# Altium PCB MainBoard.PcbDoc
Units mil, origin at the board's own origin, x right, y up, seen from the top; angles counter-clockwise.
Board outline 1122.36 x 925 mil, 2 copper layers (Top1, Bottom4), stack 42.17 mil thick; 34 components, 54 nets, 214 pads, 143 vias.
Unrouted connection lines stored in the file: 28.
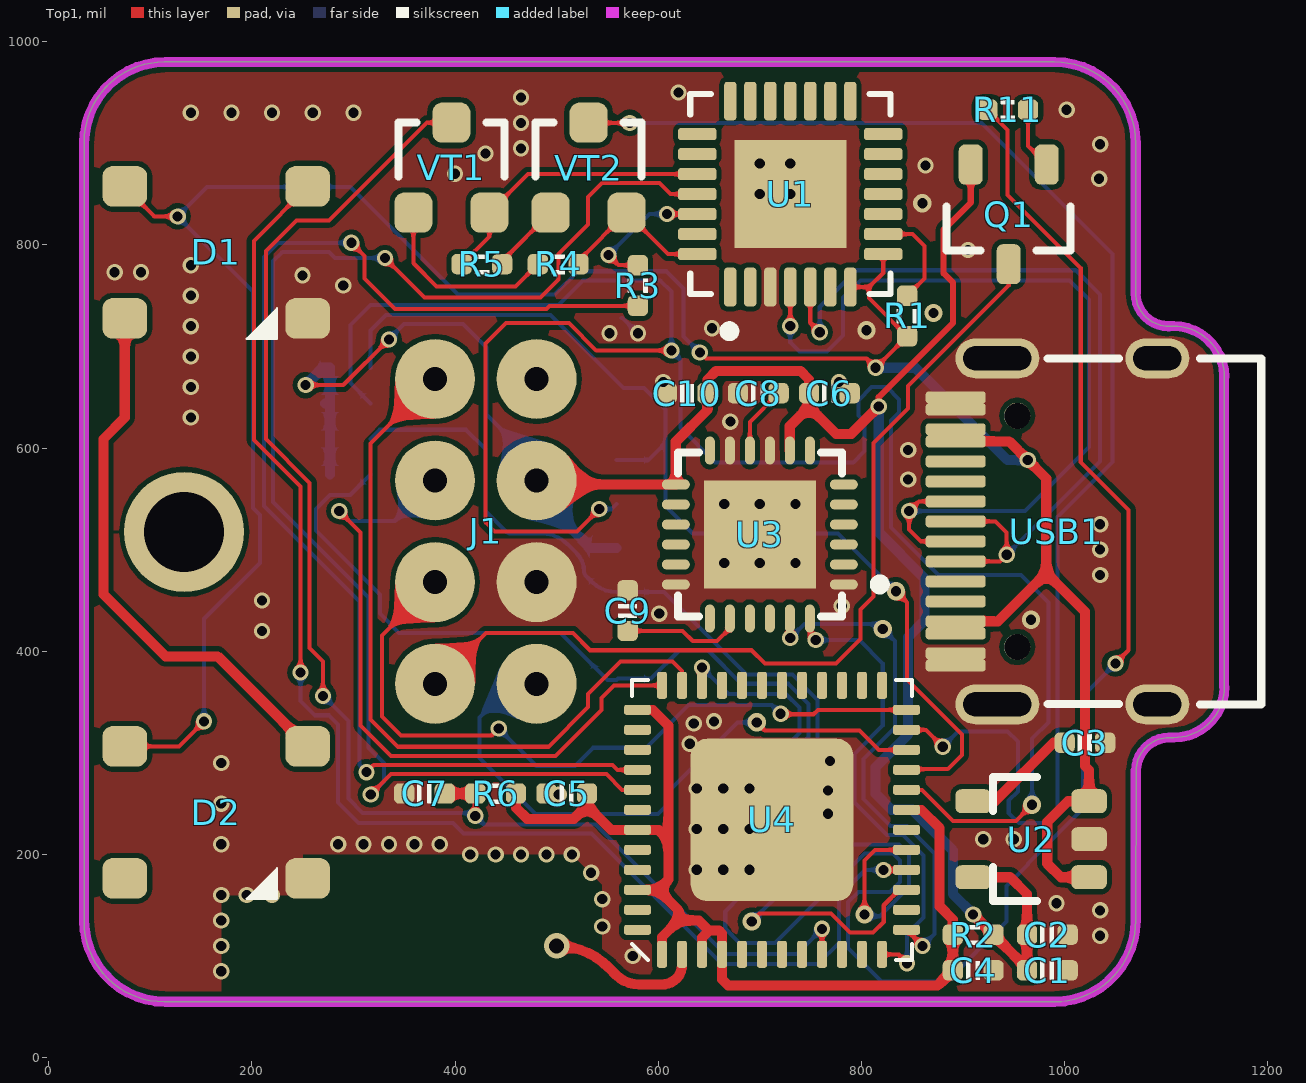
[diagram p0: Top1 view]
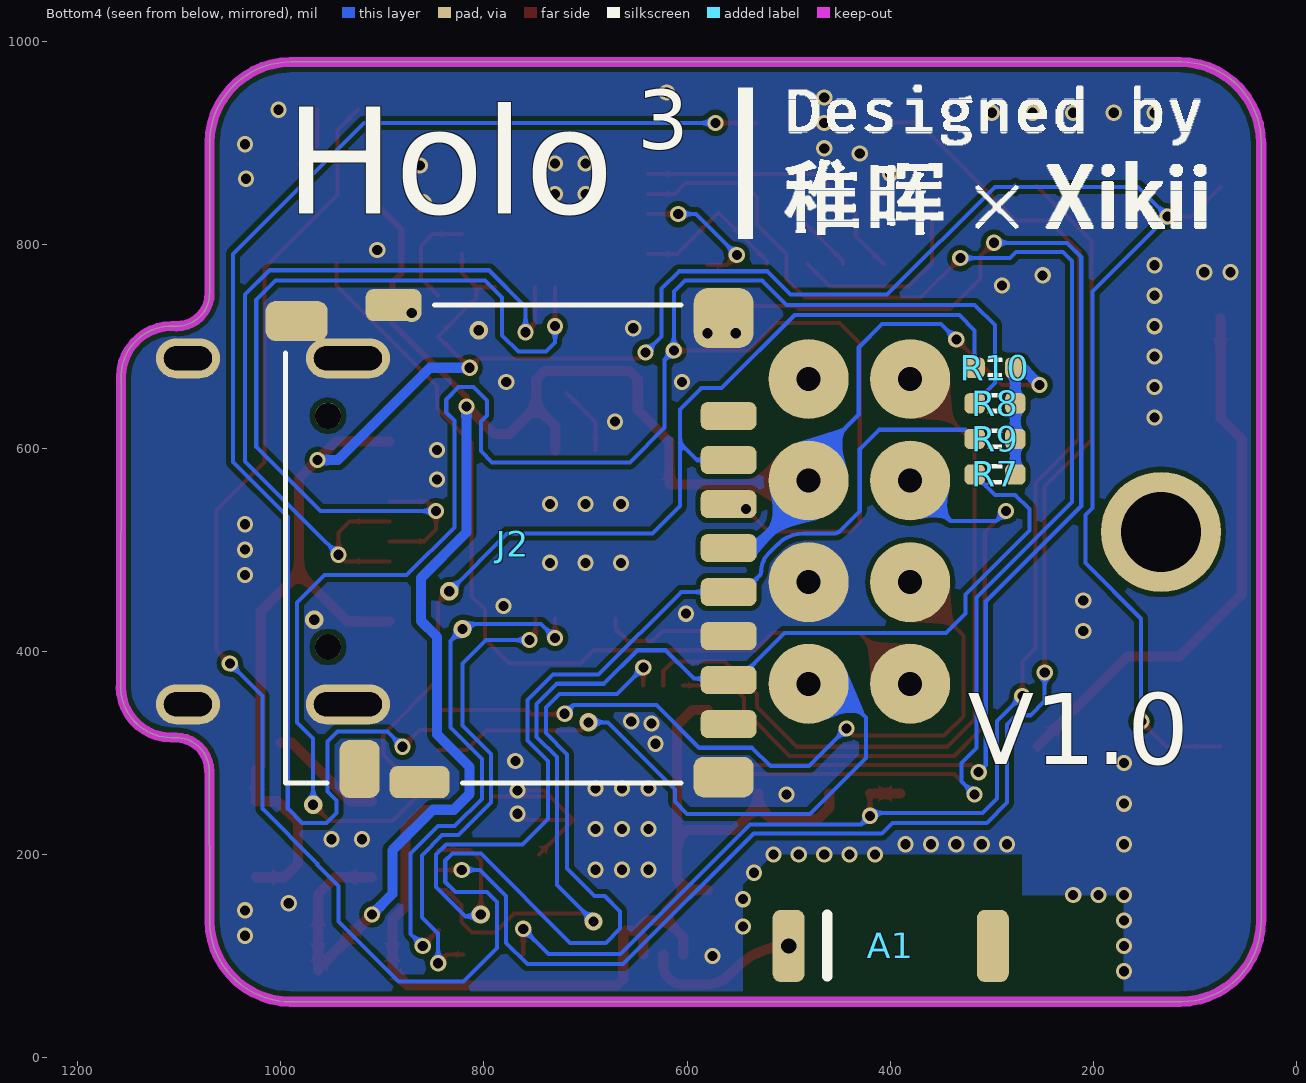
[diagram p1: Bottom4 view, seen from below]
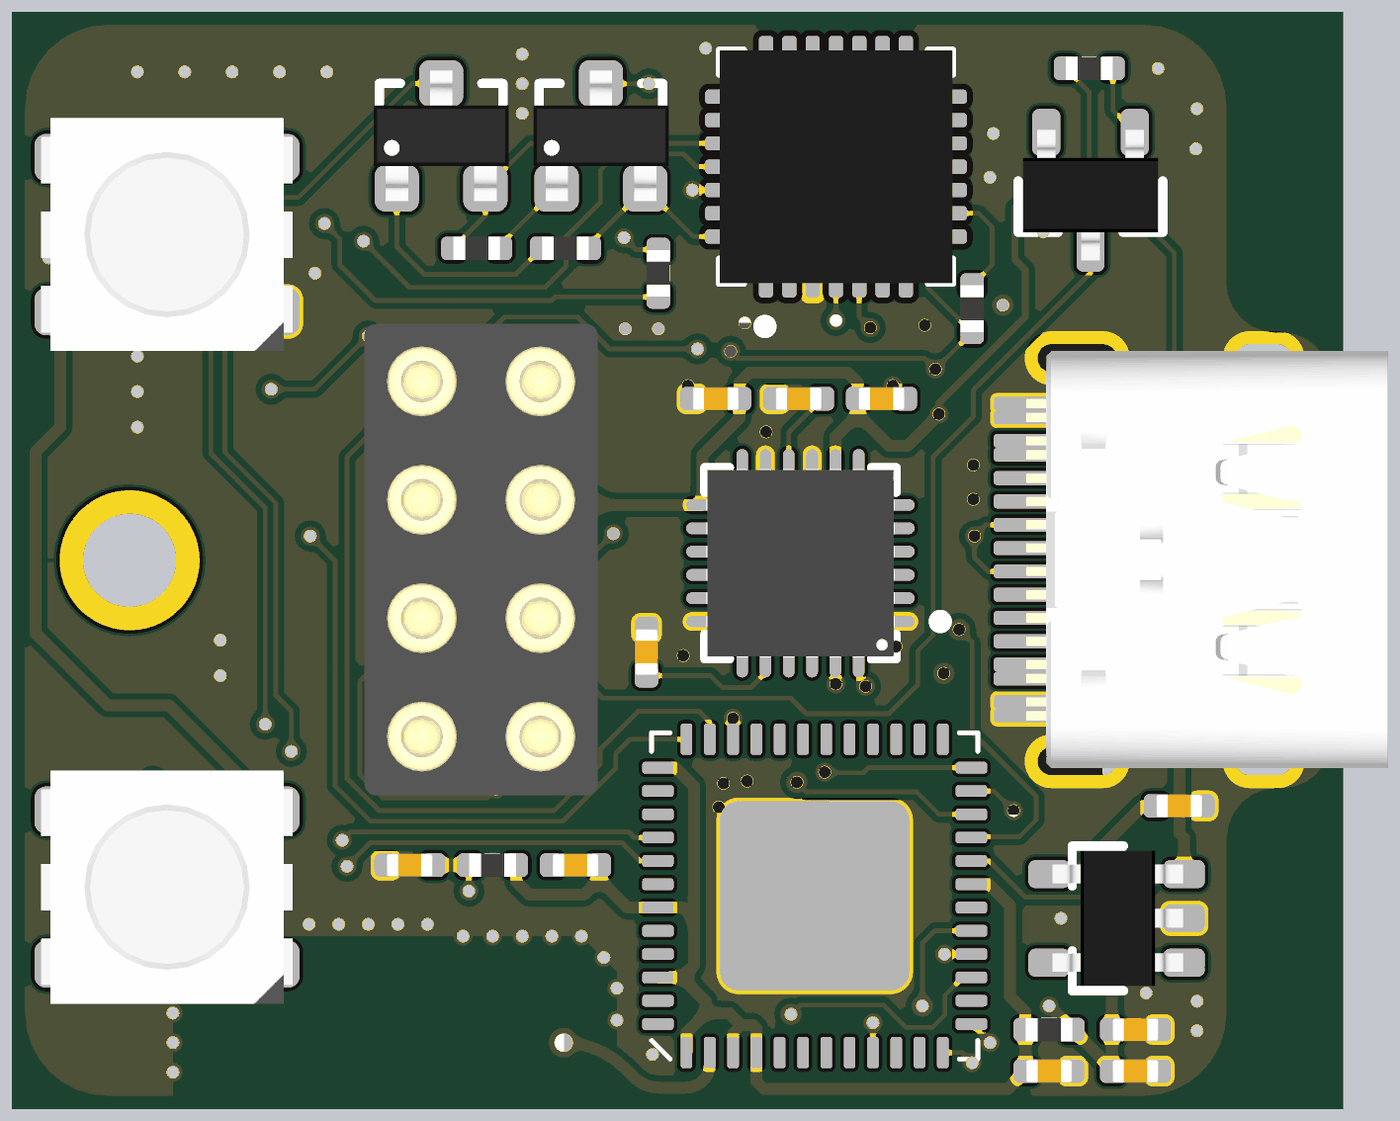
[diagram p2: 3D render of the assembled board from above, using the file's embedded part models]
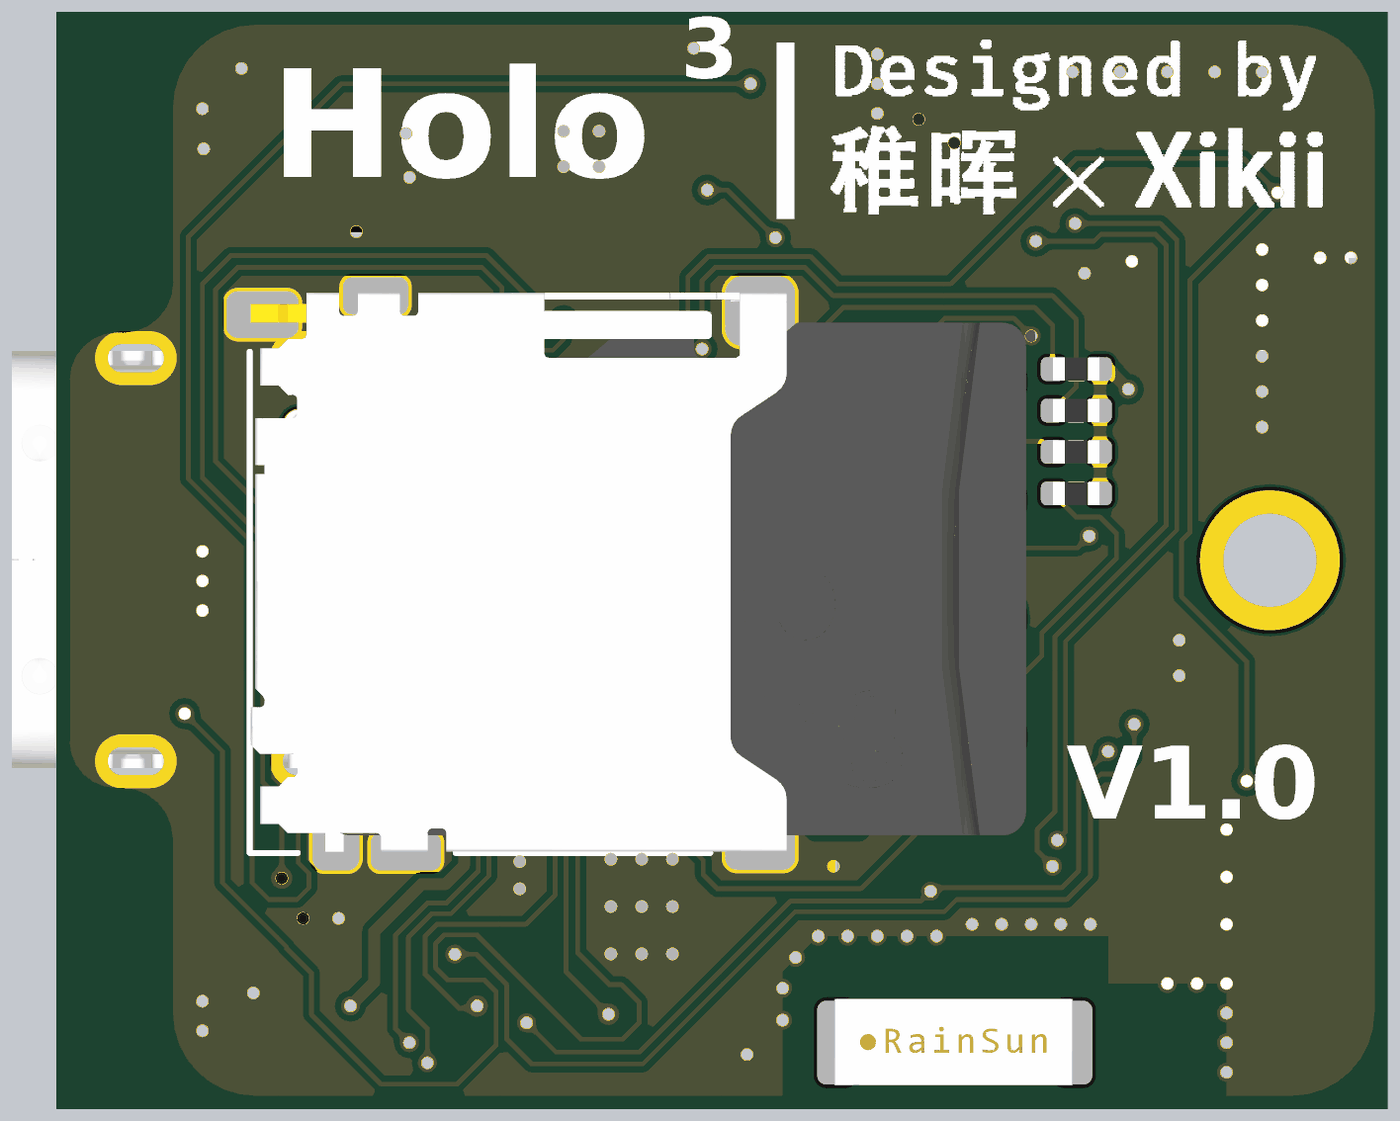
[diagram p3: 3D render of the assembled board from below, using the file's embedded part models]

## Layer stack, top to bottom
Top Solder: solder mask 0.4, Solder Resist, Dk 3.5
Top1: signal copper 1.4
Dielectric 2: core 39.37, PP-006, Dk 4.2
Bottom4: signal copper 1.4
Bottom Solder: solder mask 0.4, Solder Resist, Dk 3.5

## Board outline
34.99,133.74 34.99,901.26 cw(c113.73,901.26) 113.73,980 989.99,980 cw(c990.01,900.02) 1069.99,900 1069.99,752.48 ccw(c1102.39,752.32) 1102.47,719.92 1107.04,719.92 1107.04,720.13 cw(c1107.04,669.97) 1157.21,669.97 1157,669.97 1157.35,364.91 cw(c1107.44,364.91) 1107.44,315 1102.98,315 ccw(c1102.98,282.4) 1070.39,282.4 1069.99,135 cw(c990.01,134.98) 989.99,55 113.73,55 cw(c113.73,133.74)

## Design rules (kind name [scope] priority, off if disabled: settings)
Clearance [All] p1: gap=5 ignorepadtopadclearanceinfootprint=FALSE
ComponentClearance [All] p1: gap=0 collisioncheckmode=3 verticalgap=0 showdistances=FALSE
DiffPairsRouting [All] p1: maxlimit=9 minlimit=9 mostfreqgap=9 toplayer_minwidth=4 toplayer_maxwidth=4 toplayer_prefwidth=4 bottomlayer_minwidth=4 bottomlayer_maxwidth=4 bottomlayer_prefwidth=4 maxuncoupledlength=500
FanoutControl Fanout_BGA [All] p1: bgadir=Out bgaviamode=Centered fanoutstyle=Auto fanoutdirection=Alternating viagrid=1 // Fanout_BGA (Default Rule)
HoleSize [All] p1: absolutevalues=TRUE maxlimit=10000 minlimit=8 maxpercent=80.000 minpercent=20.000
MinimumSolderMaskSliver [All] p1 off: minsoldermaskwidth=2
PlaneClearance [All] p1: clearance=8
PlaneConnect [All] p1: planeconnectstyle=Direct reliefexpansion=20 reliefentries=4 reliefconductorwidth=10 reliefairgap=10
PolygonConnect [All] p1: connectstyle=Direct reliefconductorwidth=10 reliefentries=4 polygonreliefangle="90 Angle" airgapwidth=10
RoutingVias [All] p1: holewidth=8 width=16 viastyle="Through Hole" minholewidth=6 minwidth=12 maxholewidth=28 maxwidth=50
SilkToBoardRegionClearance [All] p1 off:
SilkToSilkClearance [All] p1: silktosilkclearance=0
SilkToSolderMaskClearance [IsPad] p1: minsilkscreentomaskgap=0 clearancetoexposedcopper=TRUE
SolderMaskExpansion [All] p1: expansion=3 istentingtop=FALSE
Width [All] p1: maxlimit=10000 minlimit=4 preferedwidth=4
20 further rules are at their usual default settings.

## Classes and differential pairs
net class GND: GND

## Components (designator, comment, footprint, x,y, rotation, side; value= is the part's Value field where it differs from the comment)
A1 "RAINSUN" ANT-Rainsun-AN5120 400,110 r180 bottom
C1 "0.1uF" CAP_0402 983,86 r180 top value=0.1u
C2 "10uF" CAP_0402 983,121 r180 top value=0.1u
C3 "10nF" CAP_0402 1020,310 r180 top value=0.1u
C4 "10uF" CAP_0402 910,86 r180 top value=0.1u
C5 "0.1uF" CAP_0402 510,260 r0 top value=0.1u
C6 "10nF" CAP_0402 768.5,654 r0 top value=0.1u
C7 "1uF" CAP_0402 370,260 r180 top value=0.1u
C8 "0.1uF" CAP_0402 698.5,654 r180 top value=0.1u
C9 "2.2nF" CAP_0402 570,440 r270 top value=0.1u
C10 "0.1uF" CAP_0402 628.5,654 r0 top value=0.1u
D1 "RGB" LED_5050_WS2812B 165,792.59 r0 top
D2 "RGB" LED_5050_WS2812B 165,241.41 r0 top
J1 "SPING-CONNECTOR-8P" SPRING-CONNECTOR-8P 430.32,518 r90 top
J2 "TF-Socket" "TF-Card-Amphenol with TF" 559.06,501.61 r90 bottom locked
Q1 "AO3415A" SOT23-3 945,830 r270 top
R1 "10K" RES_0402 845,730 r90 top value=22R
R2 "0R" RES_0402 910,121 r180 top value=22R
R3 "200R" RES_0402 580,760 r90 top value=22R
R4 "12K" RES_0402 501.5,781 r180 top value=22R
R5 "12K" RES_0402 426.5,781 r0 top value=22R
R6 "10K" RES_0402 440,260 r180 top value=22R
R7 "10K" RES_0402 296.89,574 r0 bottom value=22R
R8 "10K" RES_0402 296.89,644 r0 bottom value=22R
R9 "10K" RES_0402 296.89,609 r0 bottom value=22R
R10 "10K" RES_0402 296.89,679 r0 bottom value=22R
R11 "1K" RES_0402 944,933 r0 top value=22R
U1 "CP2102" QFN-28 730,850 r90 top value=Value
U2 "LP2992 3V3" SOT23-5 965,215 r180 top
U3 "MPU6050" QFN-24 700,515 r180 top locked
U4 "ESP32_SIP" QFN-48_7X7 712,234 r90 top
USB1 "Type-C" Type-C-TOP 992,518 r0 top
VT1 "S8050" SMT_TRIODE_NPN 396.5,876 r0 top
VT2 "S8050" SMT_TRIODE_NPN 531.5,876 r0 top

## Footprints (in the part's own frame and the unit in brackets; to place one, negate y for a bottom-side part, rotate by r counter-clockwise, add the part's x,y. Pads: shape width x height; smd on the part's side, far side on the other; paste and mask are expansions set on the pad)
ANT-Rainsun-AN5120 [mm] "选择焊盘"
  rrect50% 0.8x1.8 smd: 1(-2.54,0) ""(2.563,0)
  silkscreen extent -1.57,-0.76 -1.57,0.79, body extent -2.57,-0.91 2.54,0.94, height 1.32
CAP_0402 [mil]
  rrect50% 20x20 smd: 1(-20,0) 2(20,0)
  silkscreen extent -7,-9 7,9, body extent -20,-10 20,10, height 20
LED_5050_WS2812B [mil]
  rrect50% 44x40 smd: 1(-90,65) 2(-90,-65) 3(90,-65) 4(90,65)
  silkscreen extent 30,-85 60,-55, body extent -106,-98 106,98, height 69
QFN-24 [mm] "QFN, 24-Leads, Body 4.1x4.1mm (max), Pitch 0.50mm, IPC Low Density"
  oval 0.7x0.25 smd: 1(-2.1,1.25) 2(-2.1,0.75) 3(-2.1,0.25) 4(-2.1,-0.25) 5(-2.1,-0.75) 6(-2.1,-1.25) 13(2.1,-1.25) 14(2.1,-0.75) 15(2.1,-0.25) 16(2.1,0.25) 17(2.1,0.75) 18(2.1,1.25)
  oval 0.25x0.7 smd: 7(-1.25,-2.1) 8(-0.75,-2.1) 9(-0.25,-2.1) 10(0.25,-2.1) 11(0.75,-2.1) 12(1.25,-2.1) 19(1.25,2.1) 20(0.75,2.1) 21(0.25,2.1) 22(-0.25,2.1) 23(-0.75,2.1) 24(-1.25,2.1)
  rect 2.8x2.7 smd: ""(0,0)
  silkscreen extent -3.13,-2.05 2.05,2.05, body extent -2.02,-2.02 2.02,2.02, height 0.95
QFN-28 [mil]
  rrect50% 38x12 smd mask+5: 1(-91.5,59.06) 2(-91.5,39.37) 3(-91.5,19.68) 4(-91.5,0) 5(-91.5,-19.69) 6(-91.5,-39.37) 7(-91.5,-59.06) 15(91.5,-59.06) 16(91.5,-39.37) 17(91.5,-19.69) 18(91.5,0) 19(91.5,19.68) 20(91.5,39.37) 21(91.5,59.06)
  rrect50% 12x38 smd mask+5: 8(-59.06,-91.5) 9(-39.37,-91.5) 10(-19.68,-91.5) 11(0,-91.5) 12(19.69,-91.5) 13(39.37,-91.5) 14(59.06,-91.5) 22(59.06,91.5) 23(39.37,91.5) 24(19.69,91.5) 25(0,91.5) 26(-19.68,91.5) 27(-39.37,91.5) 28(-59.06,91.5)
  rect 106.3x110.24 smd: 29(0,0)
  silkscreen extent -140,-98 98,98, body extent -98,-98 98,98, height 35
QFN-48_7X7 [mm]
  rrect20% 4.064x4.064 smd: 0(0,0)
  rrect50% 0.675x0.25 smd: 1(-3.363,2.75) 2(-3.363,2.25) 3(-3.363,1.75) 4(-3.363,1.25) 5(-3.363,0.75) 6(-3.363,0.25) 7(-3.363,-0.25) 8(-3.363,-0.75) 9(-3.363,-1.25) 10(-3.363,-1.75) 11(-3.363,-2.25) 12(-3.363,-2.75) 25(3.363,-2.75) 26(3.363,-2.25) 27(3.363,-1.75) 28(3.363,-1.25) 29(3.363,-0.75) 30(3.363,-0.25) 31(3.363,0.25) 32(3.363,0.75) 33(3.363,1.25) 34(3.363,1.75) 35(3.363,2.25) 36(3.363,2.75)
  rrect50% 0.25x0.675 smd: 13(-2.75,-3.363) 14(-2.25,-3.363) 15(-1.75,-3.363) 16(-1.25,-3.363) 17(-0.75,-3.363) 18(-0.25,-3.363) 19(0.25,-3.363) 20(0.75,-3.363) 21(1.25,-3.363) 22(1.75,-3.363) 23(2.25,-3.363) 24(2.75,-3.363) 37(2.75,3.363) 38(2.25,3.363) 39(1.75,3.363) 40(1.25,3.363) 41(0.75,3.363) 42(0.25,3.363) 43(-0.25,3.363) 44(-0.75,3.363) 45(-1.25,3.363) 46(-1.75,3.363) 47(-2.25,3.363) 48(-2.75,3.363)
  silkscreen extent -3.5,-3.5 3.5,3.5, body extent -3.5,-3.5 3.5,3.5, height 1
RES_0402 [mil]
  rrect50% 20x20 smd: 1(-20,0) 2(20,0)
  silkscreen extent -7,-10 7,10, body extent -20,-10 20,10, height 14
SMT_TRIODE_NPN [mm] "Surface mount NPN transistor, package SOT-23"
  rrect50% 0.95x1 smd: 1(-0.95,-1.125) 2(0.95,-1.125) 3(0,1.125)
  silkscreen extent -1.33,-0.22 1.32,1.13, body extent -1.45,-1.4 1.45,1.4, height 1.3
SOT23-3 [mm] "SOT23, 3-Leads, Body 3.1x3.0mm (max), Pitch 0.95mm, IPC Medium Density"
  rrect50% 1x0.6 smd: 1(-1.246,0.95) 2(-1.246,-0.95) 3(1.246,0)
  silkscreen extent -0.2,-1.55 0.9,1.55, body extent -1.3,-1.45 1.5,1.45, height 1.2
SOT23-5 [mm] "SOT23, 3-Leads, Body 3.1x3.0mm (max), Pitch 0.95mm, IPC Medium Density"
  rrect50% 0.889x0.6 smd: 1(-1.5,0.95) 2(-1.5,0) 3(-1.5,-0.95) 4(1.396,-0.95) 5(1.396,0.95)
  silkscreen extent -0.2,-1.55 0.9,1.55, body extent -1.48,-1.45 1.32,1.45, height 1.2
SPRING-CONNECTOR-8P [mm]
  round 2 hole 0.6: 1(-3.81,1.27) 2(-3.81,-1.27) 3(-1.27,1.27) 4(-1.27,-1.27) 5(1.27,1.27) 6(1.27,-1.27) 7(3.81,1.27) 8(3.81,-1.27)
  body extent -5.06,-2.5 5.06,2.5, height 6
"TF-Card-Amphenol with TF" [mm]
  rrect50% 0.7x1.397 smd: 1(3.3,0) 2(2.2,0) 3(1.1,0) 4(0,0) 5(-1.1,0) 6(-2.2,0) 7(-3.3,0) 8(-4.4,0)
  rrect50% 1x1.55 smd: 9(5.675,10.8)
  rrect50% 1.45x1 smd: 10(-5.525,9.225)
  rrect50% 1.5x1.5 smd: S1(5.75,0.125)
  rrect50% 1.016x1.5 smd: S2(-5.727,0.125)
  rrect50% 0.8x1.4 smd: S3(6.075,8.375)
  rrect50% 0.8x1.5 smd: S4(-5.85,7.725)
  silkscreen extent -5.87,1.19 6.07,11.07, body extent -5.85,-5.58 6.15,11.06, height 1.69
Type-C-TOP [mm]
  round 0.65 hole 0.65: 0(-0.98,-2.89) 0(-0.98,2.89)
  oval 1.6x1 hole 0.6 slot 1.2 at 0 deg: 1(2.52,4.325) 2(2.52,-4.325)
  oval 2.1x1 hole 0.6 slot 1.7 at 0 deg: 3(-1.48,-4.325) 4(-1.48,4.325)
  rrect50% 1.5x0.3 smd: A1(-2.52,-3.35) A4(-2.52,-2.55) A5(-2.52,-1.25) A6(-2.52,-0.25) A7(-2.52,0.25) A8(-2.52,1.25) A9(-2.52,2.55) A12(-2.52,3.35) B1(-2.52,3.05) B4(-2.52,2.25) B5(-2.52,1.75) B6(-2.52,0.75) B7(-2.52,-0.75) B8(-2.52,-1.75) B9(-2.52,-2.25) B12(-2.52,-3.05)
  silkscreen extent -0.22,-4.33 5.12,4.33, body extent -2.57,-4.48 5.18,4.48, height 3.26

## Part data
A1: library part ANT-Rainsun-AP5120
C1 C2 C3 C4 C5 C6 C7 C8 C9 C10: library part 电容-0402, "Capacitor"
D1 D2: library part LED_5050_WS2812B, "LED", Type=5050
J2: "10 _8 + 2_ Position Card Connector Secure Digital - microSDâ„¢ Surface Mount, Right Angle Gold", Package=None, Availability=Unavailable, MF="Amphenol Commercial Products", MP=1140084168, Price=None, SnapEDA_Link=https://www.snapeda.com/parts/1140084168/Amphenol/view-part/4544529/?ref=snap
Q1: "MOSFET", LatestRevisionDate=17-Jul-2002, LatestRevisionNote="Re-released for DXP Platform.", PackageDescription="TO, Flat Index; 3 In-Line, Axial Leads; Body Dia. 4.6mm; Lead Dia. 0.5 mm (max)", PackageReference=E3, PackageVersion=1995/1996, Published=8-Jun-2000, Publisher="Altium Limited"
R1 R2 R3 R4 R5 R6 R7 R8 R9 R10 R11: library part 电阻-0402, "Resistor"
U1: "USB转TTL", MFG #1="SILICON LABS", PART DESC="SINGLE-CHIP USB TO UART BRIDGE, QFN28, RoHS.", PART NUMBER=CP2102, RefDes=RefDes, Type=DEV
U2: library part LP2992, "LDO"
U3: "六轴传感器"
U4: library part ESP32-PICO
USB1: library part USB-Type-C-TOP
VT1 VT2: library part SMT_TRIODE_NPN, "Surface mount NPN transistor, package SOT-23"

## Free pads (board coordinates)
  round 118.11 hole 78.74: ""(133.42,517.5)

## Via types
v1: diameter 16, hole 10, Top1 to Bottom4, tented both sides, 132 vias
v2: diameter 18, hole 10, Top1 to Bottom4, tented both sides, 10 vias
v3: diameter 25, hole 15, Top1 to Bottom4, tented both sides, 1 vias

## Nets (pads, with @x,y where several pads share a name; then routed paths per layer and width w, separated by ;. In a path a pad name is that pad's centre, name@x,y a point inside that pad or via, vN(x,y) a via of type N, cw(c..) or ccw(c..) an arc to the next point about the centre after c; other vN are vias at no path point)
3V3: C1.2 C2.2 C6.1 C10.2 J1.6 J2.4 Q1.2 R2.1 R7.1 R8.1 R9.1 R10.1 U2.5 U3.8 U3.13 | length 2226.5
  Top1 w4: v1(253,662) 290,662 v1(334.95,706.95)
  Top1 w6: v1(817,641) 817,650 890,723 890,763 881,772 881,815 907.6,841.6 Q1.2
  Top1 w10: J1.6@484.1,564.21 U3.13 617.32,606.32 648.5,637.5 C10.2 648.5,667.5 657,676 740,676 748.5,667.5 C6.1 748.5,640.5 ; U3.8 729.53,621.53 748.5,640.5 ; v1(817,641) 790,614 775,614 748.5,640.5 ; v1(910,141) R2.1 C1.2@963,88 ; U2.5 946.4,177.6 963,161 C2.2 C1.2@963,88 ; C1.2 C1.2@963,88
  Bottom4 w4: v1(334.95,706.95) 350,722 408,722 431,699 431,633 480.32,583.68 J1.6
  Bottom4 w10: v1(253,662) 270,679 R10.1 R8.1 ; R8.1@272,644 R8.1 ; R7.1 R9.1 R8.1 ; J1.6 480.32,554.68 533.39,501.61 J2.4 ; v1(817,641) 817,517 862,472 862,430 846,414 846,318 814,286 814,259.7 829.7,244 850,244 890,204 890,161 v1(910,141)
3V3A: C4.2 C5.2 R2.2 R6.1 U4.1 U4.3 U4.4 U4.19 U4.37 U4.43 U4.46 | length 1041.9
  Top1 w10: R6.1 460,246 471,235 517,235 530,248 ; C5.2 530,248 ; U4.46 599.9,165.1 ; U4.37 594.73,342.27 610,327 610,215 ; U4.1 603.73,118.73 620,135 ; U4.3 643.1,118.1 650,125 ; U4.19 859.16,243.84 877,226 877,149 890,136 R2.2 C4.2 875,71 669,71 662.79,77.21 U4.4 662.79,122.21 660,125 650,125 ; 530,248 553.84,224.16 U4.43 600.84,224.16 610,215 ; 599.9,165.1 610,175.2 610,215 ; 599.9,165.1 620,145 620,135 ; 620,135 640,135 650,125
BH_SCL: U3.23 U4.13 | length 513.8
  Top1 w4: U3.23 729.9,431.95 v1(729.9,413.1) ; U4.13 v1(860.11,110)
  Bottom4 w4: v1(729.9,413.1) 743.79,427 816,427 v2(821,422) 833,410 833,325 802,294 802,254.73 828.73,228 845,228 872,201 872,121.89 v1(860.11,110)
BH_SDA: U3.24 U4.12 | length 480.1
  Top1 w4: U3.24 749.21,413.79 752,411 v1(755,411) ; U4.12 836.38,101.62 v1(845,93)
  Bottom4 w4: v1(755,411) 798,411 821,388 821,327 793,299 793,251 825,219 841,219 861,199 861,138 845,122 v1(845,93)
CP_Rx: U1.25 U4.41 | length 1374.3
  Top1 w4: v1(317,259) 337,279 549,279 564.47,263.53 U4.41 ; v1(331,787) 370,748 484,748 502,766 502,791 531,820 531,847 544.69,860.69 601.32,860.69 612,850 U1.25
  Bottom4 w4: v1(317,259) 330,272 330,290 315,305 315,453 221,547 221,784 230,793 276,793 282,787 v1(331,787)
CP_Tx: R3.1 U4.40 | length 1235.2
  Top1 w4: v1(298,802) 311,789 311,767 341,737 490,737 493,740 R3.1 ; v1(313,281) 320,288 555,288 559.79,283.21 U4.40
  Bottom4 w4: v1(298,802) 226,802 212,788 212,543 306,449 306,288 v1(313,281)
DC: J1.2 U4.22 | length 608.7
  Top1 w4: v2(697,330) 705,322 798,322 817.1,302.9 U4.22
  Bottom4 w4: J1.2 457,368 424,335 424,295 479,240 600,240 612,252 612,264 678,330 v2(697,330)
DTR: R4.1 U1.28 VT2.2 | length 156.8
  Top1 w4: R4.1 521.5,784.31 VT2.2 609.67,790.94 U1.28
EN: C7.1 R6.2 U4.9 VT1.3 | length 1427.6
  Top1 w4: v1(270,356) 270,390 257,403 257,565.73 214,608.73 214,794 244,824 276,824 372.29,920.29 VT1.3 ; C7.1@388,262 C7.1 ; v1(420,238) R6.2 ; U4.9 v1(761.21,126.79)
  Top1 w10: C7.1 R6.2
  Bottom4 w4: v1@270,356.41 295,331.41 295,255 309,241 417,241 v1(420,238) 428.36,229.64 538.09,229.64 665.73,102 736.43,102 v1(761.21,126.79)
FLASH_CLK: U4.31
FLASH_CS: U4.25
FLASH_SD0: U4.27
FLASH_SD1: U4.33
FLASH_SD2: U4.30
FLASH_SD3: U4.32
GND: C1.1 C2.1 C3.1 C4.1 C5.1 C6.2 C7.2 C8.2 C9.1 C10.1 D1.3 D2.3 J1.4 J2.6 J2.9 J2.10 J2.S1 J2.S2 J2.S3 J2.S4 U1.3 U1.29 U2.2 U3. U3.1 U3.9 U3.11 U3.18 U4.0 USB1.1 USB1.2 USB1.3 USB1.4 USB1.A1 USB1.A12 USB1.B1 USB1.B12 | length 263.8
  Top1 w4: U4.0@745.9,200.1 U4.0 ; v1(767,240) 763,240 757,234 U4.0 ; v1(767,263) 741,263 U4.0@725,247 ; U4.0@790,257 735,257 U4.0@725,247 ; U4.0 U4.0@725,247
  Bottom4 w4: J2.S1 565.01,727.99 v1(580,713)
  other v1: 170,85 575,100 170,110 1035,120 545,129 170,135 1035,145 992,152 545,156 170,160 195,160 220,160 534,182 638,185 664,185 690,185 415,200 440,200 465,200 490,200 515,200 170,210 285,210 310,210 335,210 360,210 385,210 920,215 950,215 638,225 664,225 690,225 170,250 502,259 638,265 664,265 690,265 170,290 769,292 631,309 635,329 655,331 210,420 601,437 780.71,444.63 210,450 1035,475 665,487 700,487 735,487 1035,500 1035,525 665,545 700,545 735,545 846,569 846,598 671,626 140,630 140,660 605,665 778,665 140,690 552,713 653,718 140,720 140,750 290,760 250,770 65,773 91,773 140,780 905,795 700,850 730,850 1034,865 400,870 863,878 700,880 730,880 430,890 465,895 1035,899 465,920 140,930 180,930 220,930 260,930 300,930 1002,933 465,945 620,950
  other v2: 967,431 805,716 871,733 860,841
GPIO0: U4.23 VT2.3 | length 1395.9
  Top1 w4: VT2.3 531.79,920 v1(572,920) ; U4.23 863.42,322.58 v1(880,306)
  Bottom4 w4: v1(572,920) 918,920 1047,791 1047,586.27 993,532.27 993,245 979,231 955,231 945,241 945,253 954,262 954,311 944,321 895,321 v1(880,306)
GPIO4: J1.3 U4.24 | length 726.5
  Top1 w4: J1.3 328,415.68 328,336 347,317 436,317 v1(443,324) ; v1(720.5,338.5) 721,338 753,338 757.27,342.27 U4.24
  Bottom4 w4: v1(443,324) 480,287 518,287 536,305 588,305 630,347 712,347 v1(720.5,338.5)
GPIO5: R11.1 U4.34 | length 1826.5
  Top1 w4: v1(643,384) 643.1,383.9 U4.34 ; R11.1 944,913 944,849 1015.87,777.13 1015.87,586.13 1063,539 1063,401 v1(1050,388)
  Bottom4 w4: v1(643,384) 669,358 725.54,358 739,344.54 739,319.46 718,298.46 718,186 691,159 681,159 666,144 666,127 680,113 715,113 803,201 831,201 838,194 838,173 828,163 797,163 787,153 787,108 820,75 884,75 943,134 943,169 964,190 964,191 1018,245 1018,356 v1(1050,388)
GPIO9: U4.28
GPIO10: U4.29
GPIO12: U4.18
GPIO13: J2.3 R8.2 U4.20 | length 2050.1
  Top1 w4: v1(542,540) 520,518 439,518 430,527 430,703 450,723 512,723 539,696 v1(613,696) ; U4.20 859.47,263.53 890,233 952,233 v2(968,249)
  Bottom4 w4: R8.2 297,663.89 297,721 317,741 502,741 526,765 602,765 613,754 v1(613,696) 622,687 622,620 656,586 792,586 803,597 803,626 797,632 797,647 810,660 825,660 837,648 837,635 829,627 829,521.97 875.97,475 957,475 984,448 984,330 968,314 v2(968,249) ; v1(542,540) 554.13,540 J2.3
GPIO14: J2.5 R9.2 U4.17 | length 1030
  Top1 w4: v2(803,141) 803,194 813.47,204.47 U4.17
  Bottom4 w4: R9.2 325.89,618 411,618 430,599 430,538 450,518 ; 450.01,517.99 ccw(c454.83,522.83) 454.83,516 485,516 cw(c485,479.79) 510.61,505.39 519.93,496.07 cw(c502.86,479) 527,479 ccw(c534.24,479) 529.12,473.88 534.54,468.46 ccw(c559.06,492.98) J2.5 605.69,458.31 687,377 732,377 757,352 757,312 737,292 737,235 762,210 837,210 847,200 847,168 818,139 805,139 v2(803,141)
GPIO15: J2.2 R10.2 U4.21 | length 1032.1
  Top1 w4: v2(834,459) 845,448 845,372 899,318 899,298 885,284 845.17,284 U4.21
  Bottom4 w4: R10.2 316.89,715.89 332,731 494,731 566,659 586,659 607,638 607,605 ; J2.2 590.23,588.23 607,605 ; v2(834,459) 777,516 634,516 607,543 607,605
GPIO18: J1.7 U4.35 | length 739.3
  Top1 w4: J1.7 317,604.68 317,333 344,306 492,306 531,345 531,358 563,390 614,390 623.42,380.58 U4.35
GPIO19: U4.38
GPIO21: U4.42
GPIO22: U4.39
GPIO23: J1.5 U4.36 | length 679.7
  Top1 w4: v1(286,538) 307,517 307,327 337,297 499,297 544,342 544,354 556.38,366.38 U4.36
  Bottom4 w4: v1(286,538) 296,528 340.32,528 J1.5
GPIO25: U4.14
GPIO26: J2.7 R7.2 U4.15 | length 1108.1
  Top1 w4: v2(692,134) 699.79,141.79 770.21,141.79 789,123 811.63,123 822,133.37 822,150 837.1,165.1 U4.15
  Bottom4 w4: R7.2 296.89,554 277,554 263,540 263,519 326,456 326,437 345,418 504,418 550.31,371.69 J2.7 560.36,373 593,373 621,401 649,401 682,368 728.27,368 748,348.27 748,315.73 728,295.73 728,170 v2(692,134)
GPIO27: D1.4 U4.16 | length 1362.6
  Top1 w4: v1(248,379) 248,562 202,608 202,804 D1.4@256,858 ; v1(821.79,184.79) U4.16
  Bottom4 w4: v1(248,379) 248,351 262,337 276,337 285,328 285,251 305,231 398,231 408.36,220.64 534.36,220.64 663,92 757,92 778,113 778,159 803.79,184.79 v1(821.79,184.79)
GPIO34: U4.10
GPIO35: U4.11
GPIO37: U4.6
GPIO38: U4.7
LCD_BL_VCC: J1.1 Q1.3 | length 891.2
  Top1 w4: J1.1 430.32,418 516,418 533,401 692,401 705,388 775,388 799,412 799,441 812,454 812,605 846,639 846,661 945,760 Q1.3
NetA1_1: A1.1 U4.2 | length 155.9
  Top1 w10: v3(500,110) cw(c500,37.57) 551.21,88.79 558.81,81.19 ccw(c581,103.38) 581,72 603.51,72 ccw(c603.51,92.49) 618,78 ccw(c604.92,91.08) 623.42,91.08 U4.2
NetC3_2: C3.2 U2.4 | length 113.8
  Top1 w10: U2.4 931.4,252.4 989,310 C3.2
NetC8_1: C8.1 U3.10 | length 68.1
  Top1 w4: U3.10 690.16,625.66 C8.1
NetC9_2: C9.2 U3.20 | length 119.6
  Top1 w4: C9.2 624,420 634,410 658,410 670.47,422.47 U3.20
NetD1_2: D1.2 D2.4 | length 543.7
  Top1 w10: D1.2@75,728 75,630 54,609 54,456 115,395 166.41,395 D2.4
NetQ1_1: Q1.1 R11.2 | length 61.6
  Top1 w4: R11.2 964,897.46 Q1.1
NetR1_2: R1.2 U1.9 | length 101.4
  Top1 w4: U1.9 850.37,810.63 862,799 862,767 R1.2
NetR3_2: R3.2 U1.26 | length 137.3
  Top1 w4: v1(551,790) 561,780 R3.2 ; v1(608.69,830.32) U1.26
  Bottom4 w4: v1(551,790) 591.32,830.32 v1(608.69,830.32)
NetR4_2: R4.2 VT1.1 | length 190.8
  Top1 w4: VT1.1 359.1,781.9 382,759 459.5,759 R4.2
NetR5_2: R5.2 VT2.1 | length 70.4
  Top1 w4: R5.2 446.5,784.11 VT2.1
RTS: R5.1 U1.24 VT1.2 | length 282.4
  Top1 w4: R5.1 433.9,808.4 VT1.2 471.88,869.69 U1.24
SENSOR_VN: U4.8
SENSOR_VP: U4.5
USB-PWR-DM: U1.5 USB1.A7 USB1.B7 | length 797.9
  Top1 w4: U1.5 749.69,723.32 v1(759,714) ; USB1.B7 936.47,488.47 v1(943,495) 943,517 932.16,527.84 USB1.A7
  Bottom4 w4: v1(759,714) 759,739 795,775 1011,775 1035,751 1035,587 965,517 v1(943,495)
USB-PWR-DP: U1.4 USB1.A6 USB1.B6 | length 877.3
  Top1 w4: v1(730,720) U1.4 ; USB1.A6 858.84,508.16 846.99,520.01 v1(846.99,537.99) 856.53,547.53 USB1.B6
  Bottom4 w4: v1(730,720) 730,704 739,695 766,695 782,711 782,748 799,765 1005,765 1024,746 1024,601 960.99,537.99 v1(846.99,537.99)
VDD_5V: D1.1 D2.1 R1.1 U1.7 U1.8 U2.1 U2.3 USB1.A4 USB1.A9 USB1.B4 USB1.B9 | length 2562.1
  Top1 w4: D2.1 128.41,306.41 v1(153,331) ; D1.1@75,857 104,828 v1(127,828) ; v1(641,694) 647,688 805,688 v1(814,679) R1.1 807.5,747.5 807.5,758.5 ; U1.7 807.5,758.5 ; U1.8 821.5,772.5 807.5,758.5
  Top1 w10: USB1.B9 934.42,429.42 982,477 ; USB1.B4 945.42,606.58 v1(963.71,588.29) 982,570 982,477 ; U2.1 996.4,177.6 983,191 983,232 1003.4,252.4 U2.3 1024.06,282.94 1020,287 1020,439 982,477
  Bottom4 w4: v1(153,331) 153,432 208,487 208,534 201,541 201,754 v1(127,828) 156,857 255,857 297,857 403,751 498,751 521,774 608,774 625,757 625,710 v1(641,694)
  Bottom4 w10: v1(814,679) 853,679 943.71,588.29 v1(963.71,588.29)
pads on no net: A1. D2.2 J1.8 J2.1 J2.8 U1.1 U1.2 U1.6 U1.10 U1.11 U1.12 U1.13 U1.14 U1.15 U1.16 U1.17 U1.18 U1.19 U1.20 U1.21 U1.22 U1.23 U1.27 U3.2 U3.3 U3.4 U3.5 U3.6 U3.7 U3.12 U3.14 U3.15 U3.16 U3.17 U3.19 U3.21 U3.22 U4.26 U4.44 U4.45 U4.47 U4.48 USB1.0 USB1.A5 USB1.A8 USB1.B5 USB1.B8

## Polygon pours and split planes (outlines as drawn)
GND on Top1 "GND_L01_P000" (solid, remove dead copper, pour order 0): 35,980 1155,980 1155,55 35,55
GND on Bottom4 "GND_L02_P001" (solid, remove dead copper, pour order 1): 35,980 1155,980 1155,55 35,55

## Keep-outs
Keep-Out Layer:
  lines w10: 34.82,135 34.82,900 ; 35,135 ccw(c115,135) 115,55 990,55 ccw(c990,135) 1070,135 1070,282.4 ; 35,900 cw(c115,900) 115,980 990,980 cw(c990,900) 1070,900 1070,752.5 ; 1069.9,752.5 ccw(c1102.5,752.5) 1102.5,719.9 ; 1070.4,282.4 cw(c1103,282.4) 1103,315 1107.44,315 ccw(c1107.44,364.91) 1157.35,364.91 ; 1102.5,720 1107.04,720 ; 1107.04,720.13 cw(c1107.04,669.97) 1157.21,669.97 ; 1157,364.91 1157,669.97

## Other copper
Top1:
  pour cut-out: 250,200 515,200 545,170 545,35 170,35 170,160 250,160
Bottom4:
  pour cut-out: 270,200 515,200 545,170 545,35 170,35 170,160 270,160

## Silkscreen, mask and mechanical layers (free items; w line width, h text height)
Bottom Overlay:
  drawing of 1487 lines, arcs and shapes, not listed
  text "3" at 649,875 h100
  text "Holo" at 996,796 h180
  text "V1.0" at 323.5,265.5 h120
Mechanical 1:
  lines w10: 1107.04,719.92 1102.47,719.92 cw(c1102.39,752.32) 1069.99,752.48 1069.99,900 ccw(c990.01,900.02) 989.99,980 371.29,980 344.99,980 113.73,980 ccw(c113.73,901.26) 34.99,901.26 34.99,649.8 34.99,380 34.99,133.74 ccw(c113.73,133.74) 113.73,55 989.99,55 ccw(c990.01,134.98) 1069.99,135 1070.39,282.4 cw(c1102.98,282.4) 1102.98,315 1107.44,315 ccw(c1107.44,364.91) 1157.35,364.91 1157,669.97 ; 1107.04,720.13 cw(c1107.04,669.97) 1157.21,669.97
Drill Drawing:
  circle w10: c110.62,2265.28 r33.33
  lines w10: 77.29,1631.94 110.62,1648.61 143.96,1631.94 127.29,1665.28 143.96,1698.61 110.62,1681.94 77.29,1698.61 93.96,1665.28 77.29,1631.94 ; 77.29,1815.28 110.62,1781.94 143.96,1815.28 110.62,1848.61 77.29,1815.28 ; 77.29,1998.61 143.96,1998.61 110.62,1931.94 77.29,1998.61 ; 77.29,2081.94 143.96,2081.94 143.96,2148.61 77.29,2148.61 77.29,2081.94 ; 77.29,2398.61 93.96,2398.61 110.62,2381.94 127.29,2398.61 143.96,2398.61 127.29,2415.28 143.96,2431.94 127.29,2431.94 110.62,2448.61 93.96,2431.94 77.29,2431.94 93.96,2415.28 77.29,2398.61 ; 77.29,2548.61 93.96,2548.61 93.96,2531.94 127.29,2531.94 127.29,2548.61 143.96,2548.61 143.96,2581.94 127.29,2581.94 127.29,2598.61 93.96,2598.61 93.96,2581.94 77.29,2581.94 77.29,2548.61
  lines w15: 17.5,1586.94 13225.79,1586.94 ; 17.5,2636.94 13225.79,2636.94 ; 568.38,1436.94 568.38,2786.94 ; 1158.22,1436.94 1158.22,2786.94 ; 2257.9,1436.94 2257.9,2786.94 ; 2763.78,1436.94 2763.78,2786.94 ; 3497.58,1436.94 3497.58,2786.94 ; 4687.23,1436.94 4687.23,2786.94 ; 5277.08,1436.94 5277.08,2786.94 ; 6022.88,1436.94 6022.88,2786.94 ; 7212.53,1436.94 7212.53,2786.94 ; 8066.29,1436.94 8066.29,2786.94 ; 9399.9,1436.94 9399.9,2786.94 ; 10733.51,1436.94 10733.51,2786.94 ; 11823.19,1436.94 11823.19,2786.94 ; 17.5,1436.94 13225.79,1436.94 13225.79,2786.94 17.5,2786.94 17.5,1436.94
  text "Symbol" at 107.5,2681.94 h72
  text "Count" at 613.38,2681.94 h72
  text "Hole Size" at 1203.22,2681.94 h72
  text "Plated" at 2302.9,2681.94 h72
  text "Hole Type" at 2808.78,2681.94 h72
  text "Drill Layer Pair" at 3542.58,2681.94 h72
  text "Via/Pad" at 4732.23,2681.94 h72
  text "Pad Shape" at 5322.08,2681.94 h72
  text "Template" at 6067.88,2681.94 h72
  text "Description" at 7257.53,2681.94 h72
  text "Hole Tolerance (+)" at 8111.29,2681.94 h72
  text "Hole Tolerance (-)" at 9444.9,2681.94 h72
  text "Hole Length" at 10778.51,2681.94 h72
  text "Routed Path Length" at 11868.19,2681.94 h72
  text "1" at 613.38,2531.94 h60
  text "15.00mil (0.381mm)" at 1203.22,2531.94 h60
  text "PTH" at 2302.9,2531.94 h60
  text "Round" at 2808.78,2531.94 h60
  text "Top1 - Bottom4" at 3542.58,2531.94 h60
  text "Via" at 4732.23,2531.94 h60
  text "Rounded" at 5322.08,2531.94 h60
  text "v64h38m0mx0" at 6067.88,2531.94 h60
  text "-" at 10778.51,2531.94 h60
  text "-" at 11868.19,2531.94 h60
  text "1" at 613.38,2381.94 h60
  text "78.74mil (2.000mm)" at 1203.22,2381.94 h60
  text "PTH" at 2302.9,2381.94 h60
  text "Round" at 2808.78,2381.94 h60
  text "Top1 - Bottom4" at 3542.58,2381.94 h60
  text "Pad" at 4732.23,2381.94 h60
  text "Rounded" at 5322.08,2381.94 h60
  text "c300h200" at 6067.88,2381.94 h60
  text "-" at 10778.51,2381.94 h60
  text "-" at 11868.19,2381.94 h60
  text "2" at 613.38,2231.94 h60
  text "23.62mil (0.600mm)" at 1203.22,2231.94 h60
  text "PTH" at 2302.9,2231.94 h60
  text "Slot" at 2808.78,2231.94 h60
  text "Top1 - Bottom4" at 3542.58,2231.94 h60
  text "Pad" at 4732.23,2231.94 h60
  text "Rounded" at 5322.08,2231.94 h60
  text "r160_100h60_120r100" at 6067.88,2231.94 h60
  text "47.24mil (1.200mm)" at 10778.51,2231.94 h60
  text "23.62mil (0.600mm)" at 11868.19,2231.94 h60
  text "2" at 613.38,2081.94 h60
  text "23.62mil (0.600mm)" at 1203.22,2081.94 h60
  text "PTH" at 2302.9,2081.94 h60
  text "Slot" at 2808.78,2081.94 h60
  text "Top1 - Bottom4" at 3542.58,2081.94 h60
  text "Pad" at 4732.23,2081.94 h60
  text "Rounded" at 5322.08,2081.94 h60
  text "r210_100h60_170r100" at 6067.88,2081.94 h60
  text "66.93mil (1.700mm)" at 10778.51,2081.94 h60
  text "43.31mil (1.100mm)" at 11868.19,2081.94 h60
  text "2" at 613.38,1931.94 h60
  text "25.59mil (0.650mm)" at 1203.22,1931.94 h60
  text "PTH" at 2302.9,1931.94 h60
  text "Round" at 2808.78,1931.94 h60
  text "Top1 - Bottom4" at 3542.58,1931.94 h60
  text "Pad" at 4732.23,1931.94 h60
  text "Rounded" at 5322.08,1931.94 h60
  text "c65h65" at 6067.88,1931.94 h60
  text "-" at 10778.51,1931.94 h60
  text "-" at 11868.19,1931.94 h60
  text "8" at 613.38,1781.94 h60
  text "23.62mil (0.600mm)" at 1203.22,1781.94 h60
  text "PTH" at 2302.9,1781.94 h60
  text "Round" at 2808.78,1781.94 h60
  text "Top1 - Bottom4" at 3542.58,1781.94 h60
  text "Pad" at 4732.23,1781.94 h60
  text "Rounded" at 5322.08,1781.94 h60
  text "c200h60" at 6067.88,1781.94 h60
  text "-" at 10778.51,1781.94 h60
  text "-" at 11868.19,1781.94 h60
  text "142" at 613.38,1631.94 h60
  text "10.00mil (0.254mm)" at 1203.22,1631.94 h60
  text "PTH" at 2302.9,1631.94 h60
  text "Round" at 2808.78,1631.94 h60
  text "Top1 - Bottom4" at 3542.58,1631.94 h60
  text "Via" at 4732.23,1631.94 h60
  text "Rounded" at 5322.08,1631.94 h60
  text "(Mixed)" at 6067.88,1631.94 h60
  text "-" at 10778.51,1631.94 h60
  text "-" at 11868.19,1631.94 h60
  text "158 Total" at 613.38,1481.94 h60
  text "Slot definitions :" at 107.5,1336.97 h60
  text "Routed Path Length" at 1140.19,1336.97 h60
  text "= Calculated from tool start centre position to tool end centre position." at 2242.86,1336.97 h60
  text "Hole Length" at 1140.19,1236.99 h60
  text "= Routed Path Length + Tool Size = Slot length as defined in the PCB layout" at 1832.99,1236.99 h60